# Altium PCB 数字时钟.PcbDoc
Units mm, origin at the board's own origin, x right, y up, seen from the top; angles counter-clockwise.
Board outline 152.4 x 101.6 mm, 2 copper layers (Top Layer, Bottom Layer); 41 components, 55 nets, 185 pads, 0 vias.
Unrouted connection lines stored in the file: 5.
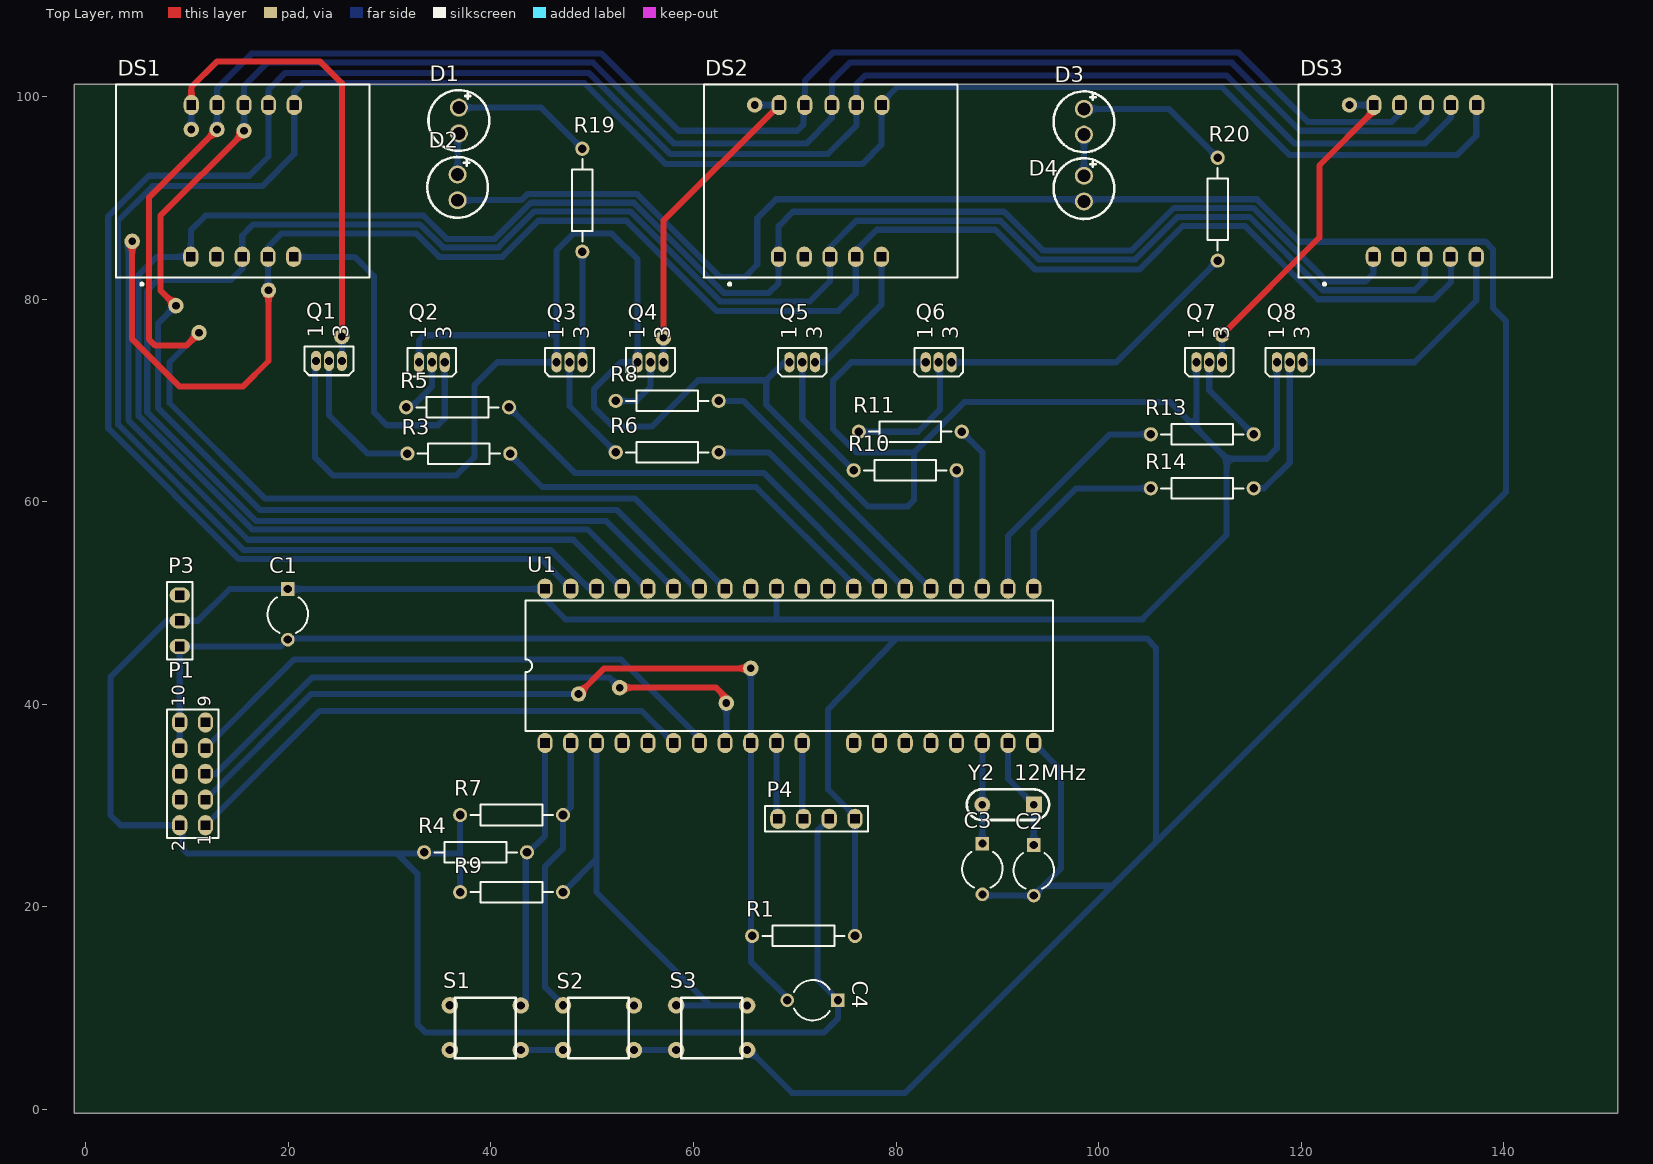
[diagram p0: Top Layer view]
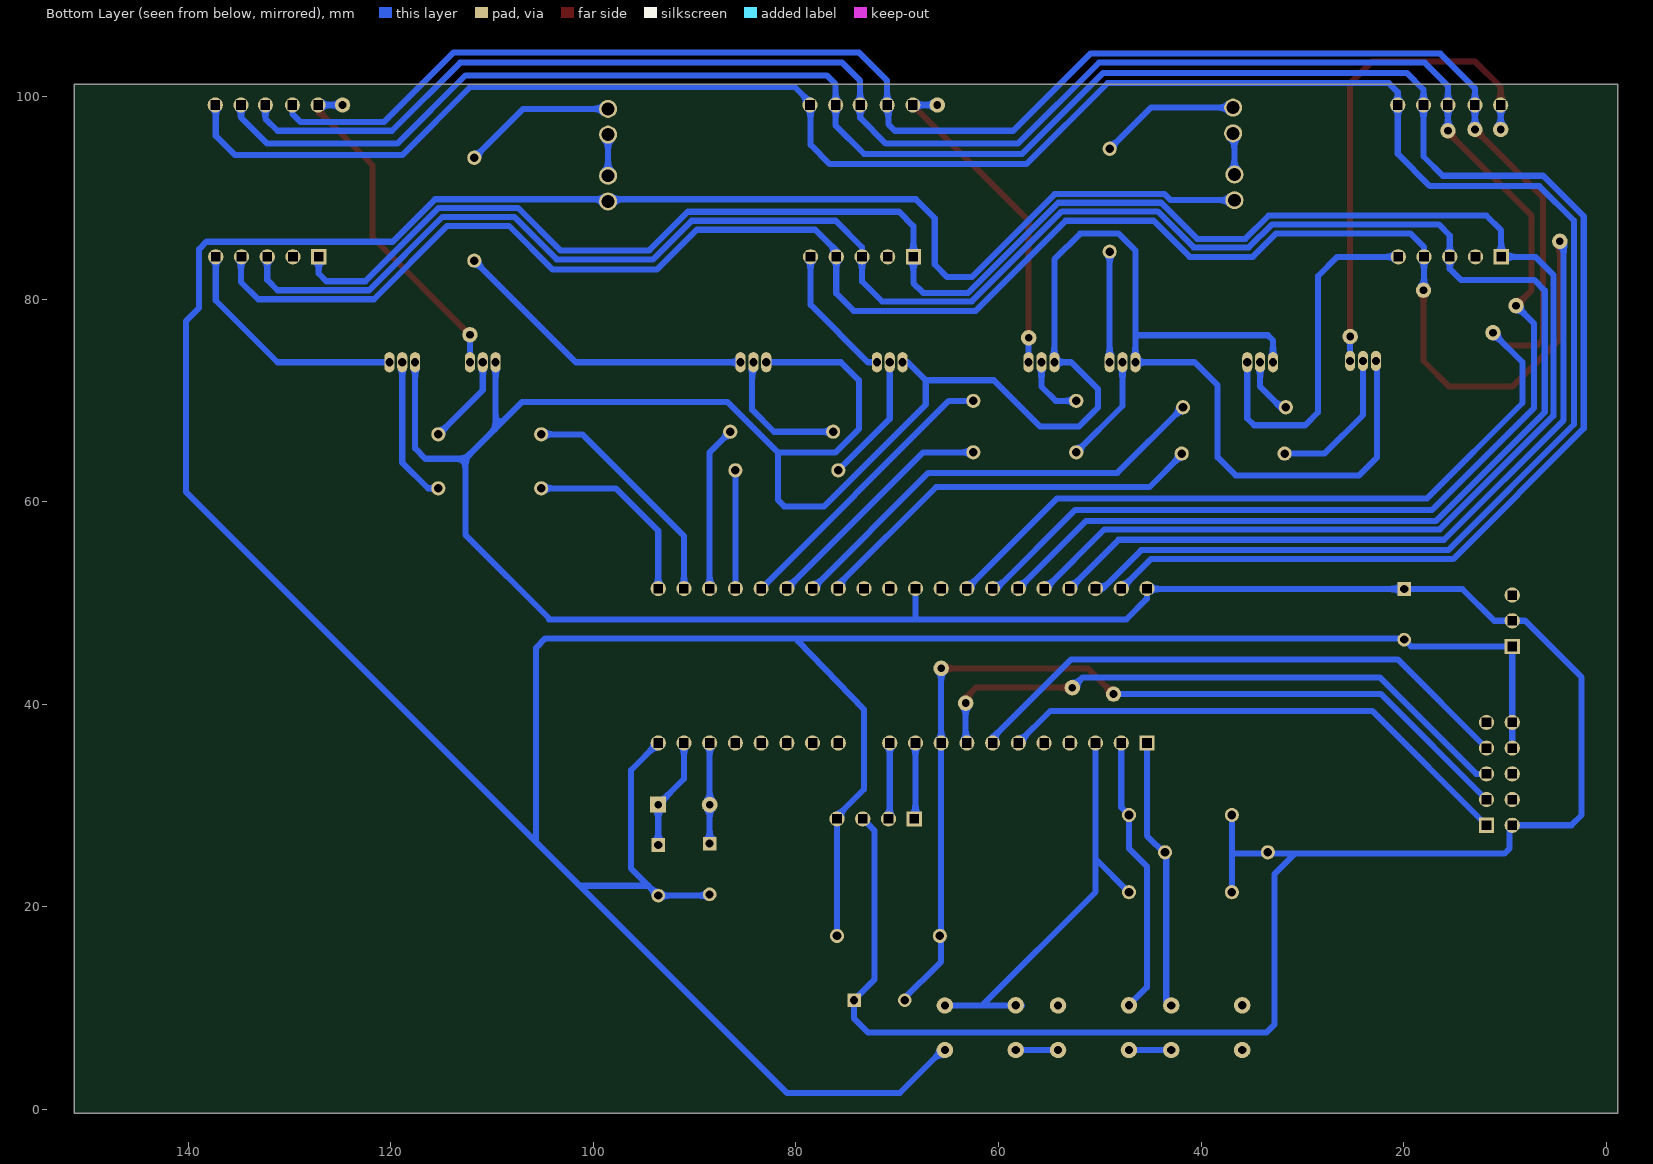
[diagram p1: Bottom Layer view, seen from below]

## Layer stack, top to bottom
Top Solder: solder mask 0.0102, Solder Resist, Dk 3.5
Top Layer: signal copper 0.0356
Dielectric1: dielectric 0.32, FR-4, Dk 4.8
Bottom Layer: signal copper 0.0356
Bottom Solder: solder mask 0.0102, Solder Resist, Dk 3.5

## Board outline
-1.143,-0.381 151.257,-0.381 151.257,101.219 -1.143,101.219

## Design rules (kind name [scope] priority, off if disabled: settings)
Clearance [All] p1: gap=0.254
FabricationTestPointUsage TestPointUsage [All] p1: valid=0 allowmultiple=FALSE
FabricationTestpoint Testpoint [All] p1: side=3 testpointundercomponent=TRUE minsize=1.016 maxsize=2.54 preferedsize=1.524 minholesize=0 maxholesize=1.016 preferedholesize=0.813 testpointgrid=0.025 allowsidetop=TRUE allowsidebottom=TRUE usegrid=TRUE gridtolerance=0
PolygonConnect [All] p1: connectstyle=Relief reliefconductorwidth=0.254 reliefentries=4 polygonreliefangle="90 Angle" airgapwidth=0.254
RoutingVias [All] p1: holewidth=0.711 width=1.27 viastyle="Through Hole" minholewidth=0.711 minwidth=1.27 maxholewidth=0.711 maxwidth=1.27
SilkToSolderMaskClearance SilkscreenOverComponentPads [IsPad] p1: minsilkscreentomaskgap=0.254 clearancetoexposedcopper=TRUE
SolderMaskExpansion [All] p1: expansion=0.102
Width [All] p1: maxlimit=1.2 minlimit=0.4 preferedwidth=0.6
27 further rules are at their usual default settings.

## Components (designator, comment, footprint, x,y, rotation, side; value= is the part's Value field where it differs from the comment)
C1 "Cap2" CAPR5-4X5 19.939,48.895 r270 top
C2 "Cap" CAPR5-4X5 93.599,23.622 r270 top
C3 "Cap" CAPR5-4X5 88.519,23.749 r270 top
C4 "Cap2" CAPR5-4X5 71.755,10.795 r180 top
D1 "LED0" LED-0 36.83,97.663 r90 top
D2 "LED0" LED-0 36.703,91.059 r90 top
D3 "LED0" LED-0 98.552,97.536 r90 top
D4 "LED0" LED-0 98.552,90.932 r90 top
DS1 "HDSM-577G" HDSM-577 2.994,82.169 r0 top
DS2 "HDSM-577G" HDSM-577 61.033,82.169 r0 top
DS3 "HDSM-577G" HDSM-577 119.761,82.169 r0 top
P1 "ISP" HDR2X5 11.811,28.067 r90 top
P3 "5V IN" HDR1X3 9.271,45.72 r90 top
P4 "CON4" HDR1X4 68.326,28.702 r0 top
Q1 "PNP" E3 24.003,73.914 r90 top
Q2 "PNP" E3 34.163,73.787 r90 top
Q3 "PNP" E3 47.752,73.787 r90 top
Q4 "PNP" E3 55.753,73.787 r90 top
Q5 "PNP" E3 70.739,73.787 r90 top
Q6 "PNP" E3 84.201,73.787 r90 top
Q7 "PNP" E3 110.922,73.787 r90 top
Q8 "PNP" E3 118.872,73.787 r90 top
R1 "Res2" AXIAL-0.4 70.866,17.145 r180 top
R3 "Res2" AXIAL-0.4 36.83,64.77 r180 top
R4 "Res2" AXIAL-0.4 38.481,25.4 r180 top
R5 "Res2" AXIAL-0.4 36.703,69.342 r180 top
R6 "Res2" AXIAL-0.4 57.404,64.897 r180 top
R7 "Res2" AXIAL-0.4 42.037,29.083 r180 top
R8 "Res2" AXIAL-0.4 57.404,69.977 r180 top
R9 "Res2" AXIAL-0.4 42.037,21.463 r180 top
R10 "Res2" AXIAL-0.4 80.899,63.119 r180 top
R11 "Res2" AXIAL-0.4 81.407,66.929 r180 top
R13 "Res2" AXIAL-0.4 110.236,66.675 r0 top
R14 "Res2" AXIAL-0.4 110.236,61.341 r0 top
R19 "Res2" AXIAL-0.4 49.022,89.789 r90 top
R20 "Res2" AXIAL-0.4 111.76,88.9 r90 top
S1 "SW" SW4/6 35.941,10.287 r0 top
S2 "SW" SW4/6 47.117,10.287 r0 top
S3 "SW" SW4/6 58.293,10.287 r0 top
U1 "AT89S52" DIP-40 69.469,43.815 r0 top
"Y2   12MHz" "XTAL" XTAL1 93.599,30.099 r180 top

## Footprints (in the part's own frame and the unit in brackets; to place one, negate y for a bottom-side part, rotate by r counter-clockwise, add the part's x,y. Pads: shape width x height; smd on the part's side, far side on the other; paste and mask are expansions set on the pad)
AXIAL-0.4 [mm] "Resistor; 2 Leads"
  round 1.4 hole 0.85: 1(-5.08,0) 2(5.08,0)
  silkscreen extent -4.06,-1.02 4.06,1.02
CAPR5-4X5 [mm] "Capacitor; 2 Leads"
  rect 1.35x1.35 hole 0.8: 1(-2.5,0)
  round 1.35 hole 0.8: 2(2.5,0)
  silkscreen extent -1.69,-2 1.82,2
DIP-40 [mm]
  oval 1.5x2 / inner rect 1.5x1.5 / far side rect 1.5x1.5 hole 0.9 square: 1(-24.13,-7.62)
  oval 1.5x2 / inner round 1.5 / far side round 1.5 hole 0.9 square: 2(-21.59,-7.62) 3(-19.05,-7.62) 4(-16.51,-7.62) 5(-13.97,-7.62) 6(-11.43,-7.62) 7(-8.89,-7.62) 8(-6.35,-7.62) 9(-3.81,-7.62) 10(-1.27,-7.62) 11(1.27,-7.62) 13(6.35,-7.62) 14(8.89,-7.62) 15(11.43,-7.62) 16(13.97,-7.62) 17(16.51,-7.62) 18(19.05,-7.62) 19(21.59,-7.62) 20(24.13,-7.62) 21(24.13,7.62) 22(21.59,7.62) 23(19.05,7.62) 24(16.51,7.62) 25(13.97,7.62) 26(11.43,7.62) 27(8.89,7.62) 28(6.35,7.62) 29(3.81,7.62) 30(1.27,7.62) 31(-1.27,7.62) 32(-3.81,7.62) 33(-6.35,7.62) 34(-8.89,7.62) 35(-11.43,7.62) 36(-13.97,7.62) 37(-16.51,7.62) 38(-19.05,7.62) 39(-21.59,7.62) 40(-24.13,7.62)
  round 0 all layers, no hole: 12(3.81,-7.62)
  silkscreen extent -26.05,-6.45 26.05,6.45
E3 [mm] "TO, Flat Index; 3 In-Line, Axial Leads; Body Dia. 4.6mm; Lead Dia. 0.5 mm (max)"
  oval 2x1 hole 0.8: 1(0,1.27) 2(0,0) 3(0,-1.27)
  silkscreen extent -1.41,-2.41 1.41,2.41
HDR1X3 [mm] "Connector; Header; 3 Position"
  oval 1.5x2 / inner rect 1.5x1.5 / far side rect 1.5x1.5 hole 0.9 square: 1(0,0)
  oval 1.5x2 / inner round 1.5 / far side round 1.5 hole 0.9 square: 2(2.54,0) 3(5.08,0)
  silkscreen extent -1.27,-1.27 6.35,1.27
HDR1X4 [mm] "Connector; Header; 4 Position"
  oval 1.5x2 / inner rect 1.5x1.5 / far side rect 1.5x1.5 hole 0.9 square: 1(0,0)
  oval 1.5x2 / inner round 1.5 / far side round 1.5 hole 0.9 square: 2(2.54,0) 3(5.08,0) 4(7.62,0)
  silkscreen extent -1.27,-1.27 8.89,1.27
HDR2X5 [mm] "Connector; Header; 5x2 Position"
  oval 2x1.5 / inner rect 1.5x1.5 / far side rect 1.5x1.5 hole 0.9 square: 1(0,0)
  oval 2x1.5 / inner round 1.5 / far side round 1.5 hole 0.9 square: 2(0,2.54) 3(2.54,0) 4(2.54,2.54) 5(5.08,0) 6(5.08,2.54) 7(7.62,0) 8(7.62,2.54) 9(10.16,0) 10(10.16,2.54)
  silkscreen extent -1.27,-1.27 11.43,3.81
HDSM-577 [mm]
  oval 1.5x2 / inner rect 1.5x1.5 / far side rect 1.5x1.5 hole 0.9 square: 1(7.366,2.032)
  oval 1.5x2 / inner round 1.5 / far side round 1.5 hole 0.9 square: 2(9.906,2.032) 3(12.446,2.032) 4(14.986,2.032) 5(17.526,2.032) 6(17.58,17.018) 7(15.04,17.018) 8(12.627,17.018) 9(9.96,17.018) 10(7.42,17.018)
  silkscreen extent -0.03,-0.8 25.02,19.05
LED-0 [mil]
  round 70 hole 50: 1(50,0) 2(-50,0)
  silkscreen extent -118,-118 118,118
SW4/6 [mil]
  round 64 hole 32: 1(0,0) 1(275.59,-0.39) 2(0,-173.62) 2(275.59,-173.62)
  silkscreen extent 20,-206 256,30
XTAL1 [mil] "Crystal, Thru-Hole; 2 Leads; Body 3.1 x 8.2 mm (HxW)"
  rect 62x62 hole 30: 1(0,0)
  round 62 hole 30: 2(200,0)
  silkscreen extent -59,-60 260,60

## Part data
C1 C2 C3 C4: "Capacitor"
D1 D2 D3 D4: "Typical INFRARED GaAs LED"
DS1 DS2 DS3: "9.2 mm Green 7-Segment Display: 2-Digit, RH DP"
P1: library part "Header 5X2", "Header, 5-Pin, Dual row"
P3: library part "Header 3", "Header, 3-Pin"
P4: library part "Header 4", "Header, 4-Pin"
Q1 Q2 Q3 Q4 Q5 Q6 Q7 Q8: "PNP Bipolar Transistor"
R1 R3 R4 R5 R6 R7 R8 R9 R10 R11 R13 R14 R19 R20: "Resistor"
S1 S2 S3: library part SW-4Pin, "2X2Pin"
U1: "8-Bit Microcontroller with 8K ISP Flash ROM"
"Y2   12MHz": "Crystal Oscillator"

## Free pads (board coordinates)
  round 1.524 hole 0.762: 2(52.705,41.656) 3(48.641,41.021) 4(63.246,40.132) 5(65.659,43.561) 10(8.89,79.375) 11(11.176,76.708) 14(12.954,96.774) 15(15.621,96.647) 16(18.034,80.899) 17(4.572,85.725) 18(10.414,96.774) 20(66.04,99.187) 21(124.768,99.187) 26(25.273,76.327) 27(57.023,76.2) 28(112.192,76.505)

## Nets (pads, with @x,y where several pads share a name; then routed paths per layer and width w, separated by ;. In a path a pad name is that pad's centre, name@x,y a point inside that pad or via, vN(x,y) a via of type N, cw(c..) or ccw(c..) an arc to the next point about the centre after c; other vN are vias at no path point)
GND: C1.2 C2.2 C3.2 D2.2 D4.2 P1.8 P1.10 P3.1 P4.4 R1.1 S1.2 S2.2 S3.2 U1.20 | length 436.7
  Bottom Layer w0.6: P1.8 P1.10 P3.1 19.264,45.72 C1.2 ; C1.2@20.06,46.516 104.741,46.516 105.664,45.593 105.664,26.416 ; S1.2@35.941,5.369 S1.2@36.449,5.877 ; D2.2 42.988,89.789 43.588,90.389 54.456,90.389 62.643,82.201 65.056,82.201 66.294,83.439 66.294,88.011 68.164,89.881 115.622,89.881 119.813,85.69 138.211,85.69 138.938,84.963 138.938,79.152 140.208,77.882 140.208,60.96 80.899,1.651 69.723,1.651 65.497,5.877 S3.2@65.293,5.877 ; S1.2@42.941,5.877 S2.2@47.117,5.877 ; S2.2@54.117,5.877 S3.2@58.293,5.877 ; R1.1 P4.4 75.946,28.944 73.279,31.611 73.279,39.497 79.771,46.228 ; C3.2 88.646,21.122 C2.2 94.575,22.098 ; U1.20 96.266,33.528 96.266,23.789 94.575,22.098 ; 101.346,22.098 94.575,22.098
NetD1_1: D1.1 R19.2 | length 14.1
  Bottom Layer w0.6: D1.1 44.958,98.933 R19.2 R19.2@48.895,94.742
NetD1_2: D1.2 D2.1 | length 4.1
  Bottom Layer w0.6: D2.1 36.703,96.266 D1.2
NetD3_1: D3.1 R20.2 | length 15.4
  Bottom Layer w0.6: D3.1 106.934,98.806 R20.2 R20.2@111.633,93.853
NetD3_2: D3.2 D4.1 | length 4.2
  Bottom Layer w0.6: D4.1@98.552,91.821 D4.1@98.679,91.694 ; D4.1 D3.2
NetDS1_5: DS1.5 Q2.3 | length 35.5
  Bottom Layer w0.6: DS1.5 26.543,84.201 28.448,82.296 28.448,68.834 29.718,67.564 34.761,67.564 35.433,68.236 Q2.3
NetDS1_10: DS1.10 pad.18 pad.26 Q1.3 | length 48.4
  Top Layer w0.6: DS1.10 10.414,100.965 12.954,103.505 23.114,103.505 25.273,101.346 pad.26
  Bottom Layer w0.6: pad.18 DS1.10 ; Q1.3 pad.26
NetDS2_5: DS2.5 Q5.3 | length 13.6
  Bottom Layer w0.6: Q5.3 72.898,73.787 78.559,79.448 DS2.5
NetDS2_10: DS2.10 pad.20 pad.27 Q4.3 | length 32.5
  Top Layer w0.6: pad.27 57.023,87.757 DS2.10
  Bottom Layer w0.6: Q4.3 pad.27 ; pad.20 DS2.10
NetDS3_5: DS3.5 Q8.3 | length 24
  Bottom Layer w0.6: Q8.3 131.191,73.787 137.287,79.883 DS3.5
NetDS3_10: DS3.10 pad.21 pad.28 Q7.3 | length 34
  Top Layer w0.6: pad.28 121.793,86.106 121.793,93.218 127.181,98.606 DS3.10
  Bottom Layer w0.6: Q7.3 pad.28 ; pad.21 DS3.10
NetQ1_2: Q1.2 R3.2 | length 14.7
  Bottom Layer w0.6: Q1.2 24.003,68.58 27.813,64.77 R3.2
NetQ2_2: Q2.2 R5.2 | length 5.8
  Bottom Layer w0.6: R5.2 32.131,69.342 34.163,71.374 Q2.2
NetQ3_2: Q3.2 R6.2 | length 10.8
  Bottom Layer w0.6: Q3.2 47.752,69.469 R6.2
NetQ3_3: Q3.3 R19.1 | length 10.9
  Bottom Layer w0.6: Q3.3 R19.1
NetQ4_2: Q4.2 R8.2 | length 6.4
  Bottom Layer w0.6: R8.2 54.356,69.977 55.753,71.374 Q4.2
NetQ5_2: Q5.2 R10.2 | length 12.8
  Bottom Layer w0.6: Q5.2 70.739,68.199 R10.2
NetQ6_2: Q6.2 R11.2 | length 13.6
  Bottom Layer w0.6: R11.2 82.169,66.929 84.328,69.088 84.328,73.66 Q6.2
NetQ6_3: Q6.3 R20.1 | length 30.4
  Bottom Layer w0.6: Q6.3 101.727,73.787 R20.1
NetQ7_2: Q7.2 R13.2 | length 9
  Bottom Layer w0.6: Q7.2 110.922,71.034 115.281,66.675 R13.2
NetQ8_2: Q8.2 R14.2 | length 14.4
  Bottom Layer w0.6: R14.2 116.332,61.341 118.872,63.881 Q8.2@118.872,73.66
P0.0: DS1.7 DS2.7 DS3.7 U1.39 | length 229.5
  Bottom Layer w0.6: U1.39 44.958,54.356 15.113,54.356 2.211,67.258 2.211,80.264 2.211,88.19 6.223,92.202 16.129,92.202 18.034,94.107 DS1.7 18.034,100.711 19.685,102.362 49.657,102.362 57.658,94.361 73.279,94.361 76.073,97.155 DS2.7 76.073,101.219 76.962,102.108 112.631,102.108 119.362,95.377 132.207,95.377 134.801,97.971 DS3.7
P0.1: DS1.6 DS2.6 DS3.6 U1.38 | length 232.9
  Bottom Layer w0.6: U1.38 49.723,51.435 45.913,55.245 15.588,55.245 3.175,67.658 3.175,80.264 3.175,87.757 6.604,91.186 17.399,91.186 20.574,94.361 DS1.6 20.574,100.457 21.463,101.346 49.236,101.346 57.237,93.345 76.654,93.345 78.559,95.25 78.559,99.133 DS2.6 78.613,99.441 80.137,100.965 112.158,100.965 118.889,94.234 135.382,94.234 137.287,96.139 137.287,99.133 DS3.6
P0.2: DS1.4 DS2.4 DS3.4 pad.16 pad.17 U1.37 | length 249.7
  Top Layer w0.6: pad.17 4.572,76.073 9.271,71.374 15.494,71.374 18.034,73.914 pad.16
  Bottom Layer w0.6: pad.17 4.191,85.344 4.191,80.264 4.191,68.079 16.009,56.261 48.133,56.261 U1.37 ; pad.16 17.98,80.953 DS1.4 17.98,85.163 19.304,86.487 32.602,86.487 34.888,84.201 41.122,84.201 44.678,87.757 53.366,87.757 62.256,78.867 74.295,78.867 76.019,80.591 DS2.4 76.019,84.782 78.105,86.868 89.789,86.868 93.726,82.931 104.013,82.931 108.331,87.249 114.427,87.249 121.666,80.01 133.096,80.01 134.801,81.715 134.801,84.147 DS3.4
P0.3: DS1.1 DS2.1 DS3.1 U1.36 | length 218.1
  Bottom Layer w0.6: U1.36 55.372,51.435 49.53,57.277 16.429,57.277 5.207,68.499 5.207,80.264 5.207,82.423 6.985,84.201 DS1.1 10.36,86.814 11.811,88.265 33.339,88.265 35.625,85.979 40.386,85.979 43.942,89.535 54.102,89.535 62.992,80.645 67.437,80.645 68.399,81.607 DS2.1 68.399,87.23 69.815,88.646 90.665,88.646 94.475,84.836 103.251,84.836 107.442,89.027 115.269,89.027 122.508,81.788 126.365,81.788 127.127,82.55 DS3.1
P0.4: DS1.3 DS2.3 DS3.3 U1.35 | length 222.4
  Bottom Layer w0.6: U1.35 51.343,58.131 16.783,58.131 6.061,68.853 6.061,80.264 6.061,80.864 7.112,81.915 14.351,81.915 15.44,83.004 DS1.3 15.44,86.306 16.545,87.411 32.985,87.411 35.271,85.125 40.74,85.125 44.296,88.681 53.748,88.681 62.638,79.791 71.501,79.791 73.479,81.769 DS2.3 73.479,85.163 76.073,87.757 90.297,87.757 94.107,83.947 103.619,83.947 107.81,88.138 114.9,88.138 122.139,80.899 131.191,80.899 132.207,81.915 DS3.3
P0.5: DS1.8 DS2.8 DS3.8 pad.10 pad.15 U1.34 | length 228.4
  Top Layer w0.6: pad.10 7.366,80.899 7.366,88.265 15.621,96.52 pad.15
  Bottom Layer w0.6: pad.10@8.763,79.248 7.112,77.597 7.112,76.835 7.112,69.288 17.218,59.182 52.451,59.182 60.198,51.435 U1.34 ; pad.15 DS1.8 15.621,101.092 17.907,103.378 50.078,103.378 58.079,95.377 71.12,95.377 73.66,97.917 DS2.8 73.66,101.6 75.438,103.378 113.157,103.378 119.888,96.647 131.191,96.647 132.388,97.844 DS3.8
P0.6: DS1.9 DS2.9 DS3.9 pad.11 pad.14 U1.33 | length 235
  Top Layer w0.6: pad.11 9.906,75.438 6.858,75.438 6.223,76.073 6.223,90.043 pad.14
  Bottom Layer w0.6: pad.11 8.255,73.787 8.255,69.762 17.692,60.325 54.229,60.325 U1.33 ; pad.14 DS1.9 12.954,100.838 16.383,104.267 50.927,104.267 58.547,96.647 70.231,96.647 70.866,97.282 70.866,99.06 DS2.9 70.993,101.6 73.787,104.394 113.792,104.394 120.685,97.501 128.905,97.501 129.721,98.317 DS3.9
P1.0: R4.1 S1.1 U1.1 | length 26.2
  Bottom Layer w0.6: S1.1@43.434,10.77 43.434,25.146 45.339,27.051 U1.1
P1.1: R7.1 S2.1 U1.2 | length 27.7
  Bottom Layer w0.6: S2.1@47.117,10.287 45.339,12.065 45.339,24.003 47.117,25.781 R7.1 47.879,29.845 U1.2
P1.2: R9.1 S3.1 U1.3 | length 43
  Bottom Layer w0.6: R9.1 50.419,24.765 U1.3 ; 50.419,24.892 50.419,21.463 61.595,10.287 ; S3.1@57.658,10.287 58.293,10.287 61.595,10.287 ; S3.1@65.293,10.277 65.283,10.287 61.595,10.287
P1.3: U1.4
P1.4: U1.5
P1.5: P1.1 U1.6 | length 52.2
  Bottom Layer w0.6: P1.1 23.114,39.37 54.864,39.37 U1.6
P1.6: P1.7 U1.7 | length 56.1
  Bottom Layer w0.6: P1.7 20.574,44.45 52.832,44.45 60.579,36.703 U1.7
P1.7: P1.5 pad.2 pad.4 U1.8 | length 60.7
  Top Layer w0.6: pad.2 62.23,41.656 63.119,40.767 pad.4@63.119,40.132
  Bottom Layer w0.6: P1.5 12.827,33.147 22.352,42.672 51.689,42.672 pad.2 ; U1.8 63.246,36.322 pad.4
P2.0: R14.1 U1.21 | length 19
  Bottom Layer w0.6: U1.21 93.599,57.15 97.79,61.341 R14.1
P2.1: R13.1 U1.22 | length 23.5
  Bottom Layer w0.6: U1.22 91.059,56.642 101.092,66.675 R13.1
P2.2: R11.1 U1.23 | length 16.3
  Bottom Layer w0.6: R11.1 88.519,64.897 U1.23
P2.3: R10.1 U1.24 | length 11.7
  Bottom Layer w0.6: U1.24 R10.1
P2.4: R8.1 U1.25 | length 28.6
  Bottom Layer w0.6: R8.1 64.897,69.977 U1.25
P2.5: R6.1 U1.26 | length 24
  Bottom Layer w0.6: R6.1 67.437,64.897 U1.26
P2.6: R5.1 U1.27 | length 44
  Bottom Layer w0.6: R5.1 48.26,62.865 66.929,62.865 U1.27
P2.7: R3.1 U1.28 | length 40.1
  Bottom Layer w0.6: R3.1@42.291,64.77 R3.1 41.91,64.643 45.085,61.468 66.167,61.468 75.819,51.816 U1.28
P3.3: U1.13
P3.4: U1.14
P3.5: U1.15
P3.6: U1.16
P3.7: U1.17
REST: C4.2 P1.3 pad.3 pad.5 R1.2 U1.9 | length 93.6
  Top Layer w0.6: pad.3 51.181,43.561 pad.5
  Bottom Layer w0.6: P1.3 22.225,41.021 pad.3 ; pad.5 U1.9 65.659,14.605 C4.2@69.532,10.731
RX: P4.1 U1.10 | length 7.7
  Bottom Layer w0.6: U1.10 68.199,28.829 P4.1@68.453,28.575
TX: P4.2 U1.11 | length 7.5
  Bottom Layer w0.6: U1.11 70.739,28.829 P4.2
VCC: C1.1 C4.1 P1.2 P3.2 P4.3 Q1.1 Q2.1 Q3.1 Q4.1 Q5.1 Q6.1 Q7.1 Q8.1 R4.2 R7.2 R9.2 U1.31 U1.40 | length 495.1
  Bottom Layer w0.6: Q1.1 22.606,73.787 22.606,64.389 24.384,62.611 36.576,62.611 38.354,64.389 38.354,71.501 40.64,73.787 Q3.1 46.482,76.708 ; Q2.1 32.893,75.946 33.401,76.454 46.228,76.454 46.482,76.708 ; R9.2 36.957,25.273 ; R7.2 36.957,25.273 ; U1.31 68.199,48.387 ; Q5.1 68.961,73.787 67.183,72.009 ; P4.3 72.263,27.559 72.263,12.827 C4.1@74.486,10.604 ; C4.1 74.255,8.977 72.898,7.62 33.528,7.62 32.766,8.382 32.766,23.241 30.734,25.273 ; Q6.1 75.565,73.787 73.787,72.009 73.787,67.183 76.073,64.897 81.788,64.897 ; 104.394,48.387 104.267,48.387 ; Q7.1 109.652,67.259 ; Q8.1 117.602,65.278 116.586,64.262 112.649,64.262 ; 30.734,25.273 36.957,25.273 ; 30.734,25.273 10.033,25.273 9.525,25.781 9.525,27.813 P1.2 3.429,28.067 2.413,29.083 2.413,42.672 8.001,48.26 P3.2 11.049,48.26 14.184,51.395 C1.1 45.299,51.395 U1.40 45.339,50.419 47.371,48.387 68.199,48.387 ; 46.482,76.708 46.482,84.836 48.133,86.487 51.943,86.487 54.483,83.947 Q4.1 52.832,73.787 50.165,71.12 50.165,69.342 52.07,67.437 55.88,67.437 60.452,72.009 67.183,72.009 ; 67.183,72.009 67.183,69.596 77.216,59.563 81.153,59.563 81.788,60.198 81.788,64.897 ; 68.199,48.387 104.267,48.387 ; 81.788,64.897 86.741,69.85 107.061,69.85 109.652,67.259 ; 104.267,48.387 112.649,56.769 112.649,64.262 ; 109.652,67.259 112.649,64.262
XT1: "Y2   12MHz.2" C3.1 U1.18 | length 9.7
  Bottom Layer w0.6: C3.1@88.519,26.503 U1.18
XT2: "Y2   12MHz.1" C2.1 U1.19 | length 11.1
  Bottom Layer w0.6: U1.19 91.059,32.639 93.599,30.099 C2.1
pads on no net: DS1.2 DS2.2 DS3.2 P1.4 P1.6 P1.9 P3.3 U1.12 U1.29 U1.30 U1.32

## Other copper
Bottom Layer:
  text "电子时钟" at 98.552,107.061 h6

## Text inside footprints (layer, text, board x,y; h text height)
P1: Top Overlay "10" at 9.779,39.751 h1.27 r90; Top Overlay "9" at 12.319,39.751 h1.27 r90; Top Overlay "1" at 12.319,26.035 h1.27 r90; Top Overlay "2" at 9.779,25.527 h1.27 r90
Q1: Top Overlay "3" at 25.966,76.189 h1.5 r90; Top Overlay "1" at 23.448,76.189 h1.5 r90
Q2: Top Overlay "1" at 33.608,76.062 h1.5 r90; Top Overlay "3" at 36.126,76.062 h1.5 r90
Q3: Top Overlay "3" at 49.715,76.062 h1.5 r90; Top Overlay "1" at 47.197,76.062 h1.5 r90
Q4: Top Overlay "3" at 57.716,76.062 h1.5 r90; Top Overlay "1" at 55.198,76.062 h1.5 r90
Q5: Top Overlay "3" at 72.702,76.062 h1.5 r90; Top Overlay "1" at 70.184,76.062 h1.5 r90
Q6: Top Overlay "3" at 86.164,76.062 h1.5 r90; Top Overlay "1" at 83.646,76.062 h1.5 r90
Q7: Top Overlay "3" at 112.885,76.062 h1.5 r90; Top Overlay "1" at 110.367,76.062 h1.5 r90
Q8: Top Overlay "1" at 118.317,76.062 h1.5 r90; Top Overlay "3" at 120.835,76.062 h1.5 r90